# Altium PCB Action_Split.PcbDoc
Units mm, origin at the board's own origin, x right, y up, seen from the top; angles counter-clockwise.
Board outline 62.5 x 35 mm, 2 copper layers (Top Layer, Bottom Layer); 19 components, 10 nets, 42 pads, 0 vias.
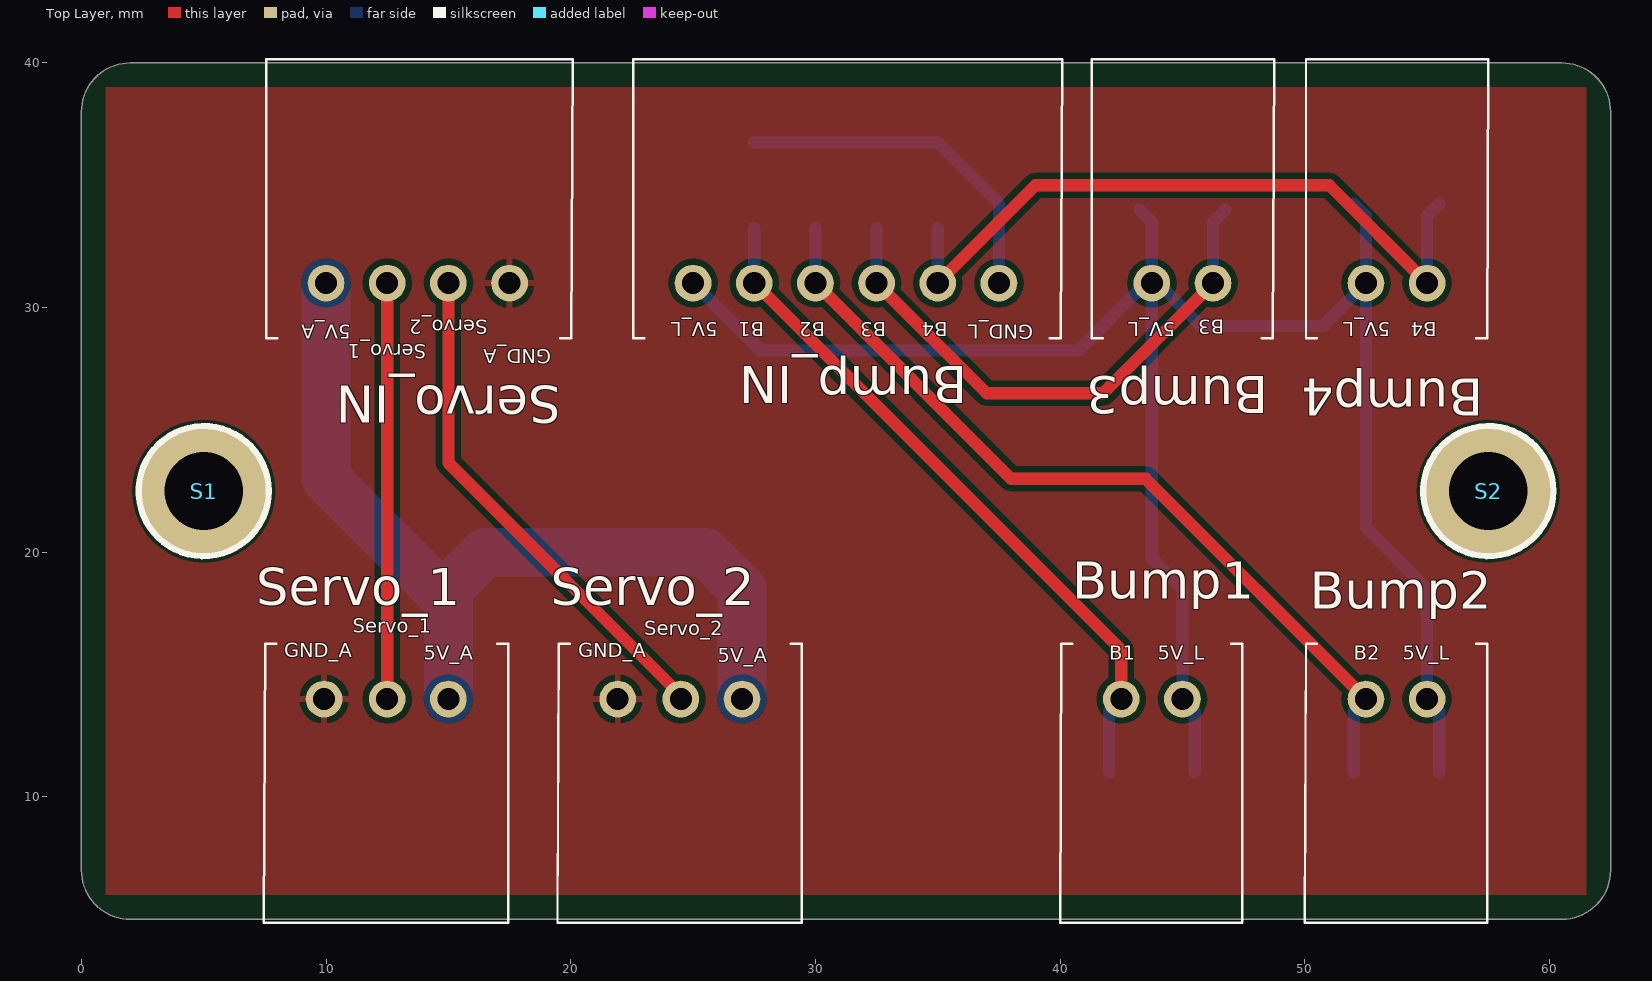
[diagram p0: Top Layer view]
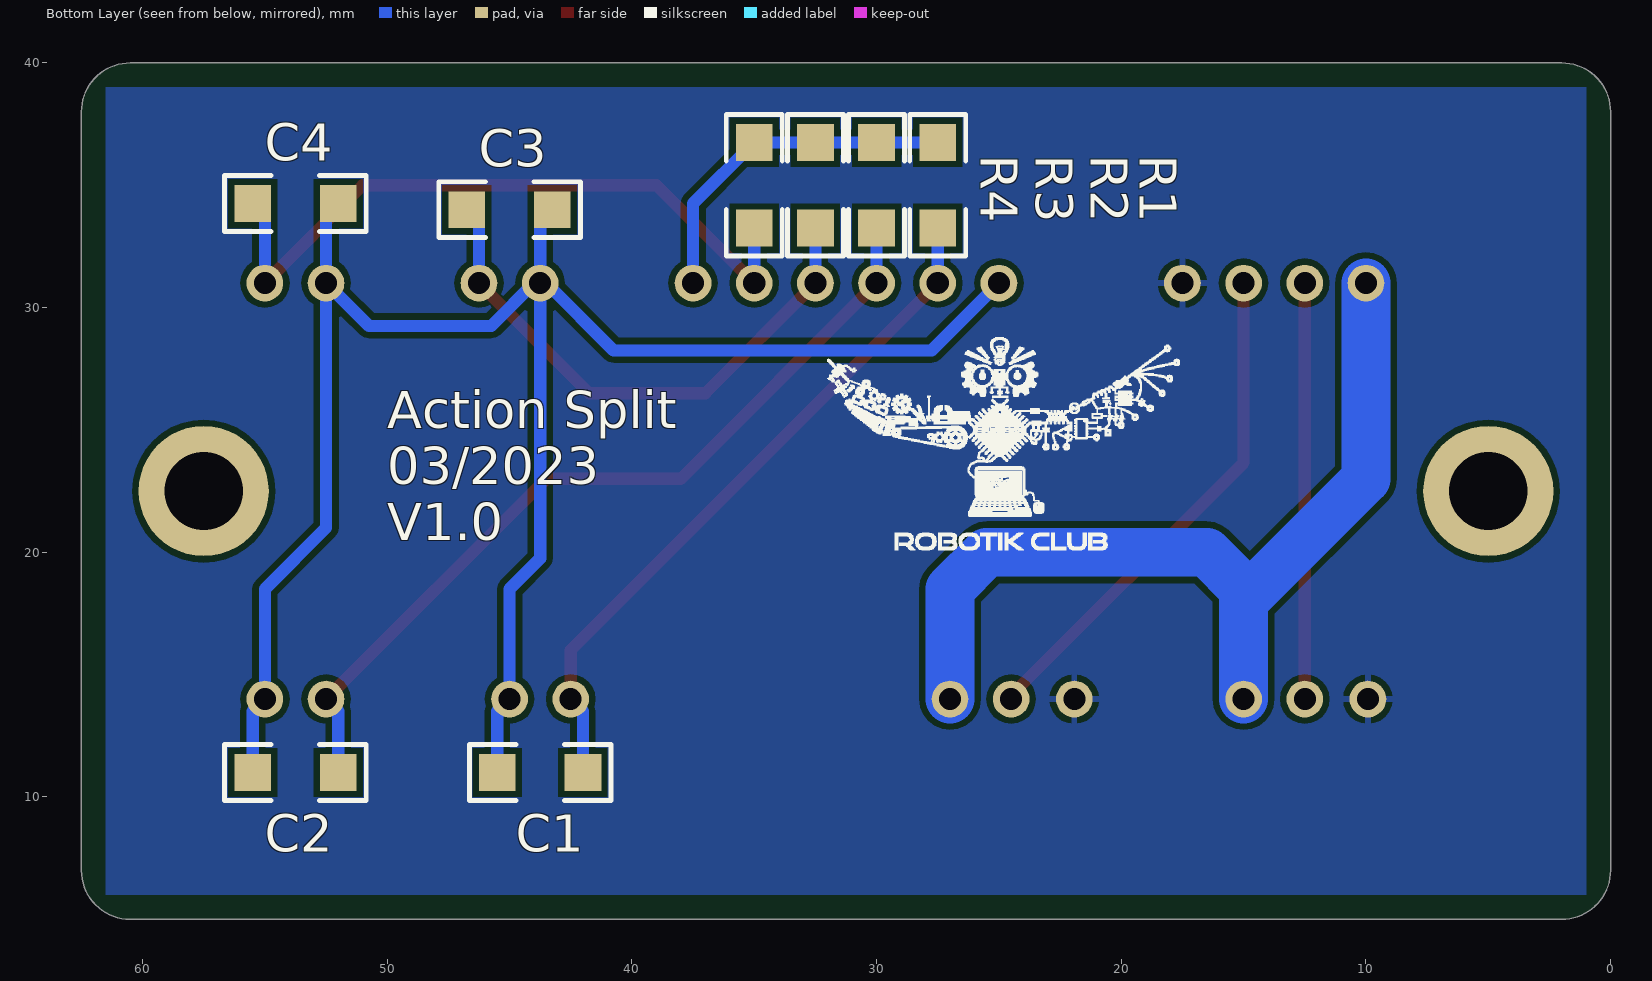
[diagram p1: Bottom Layer view, seen from below]
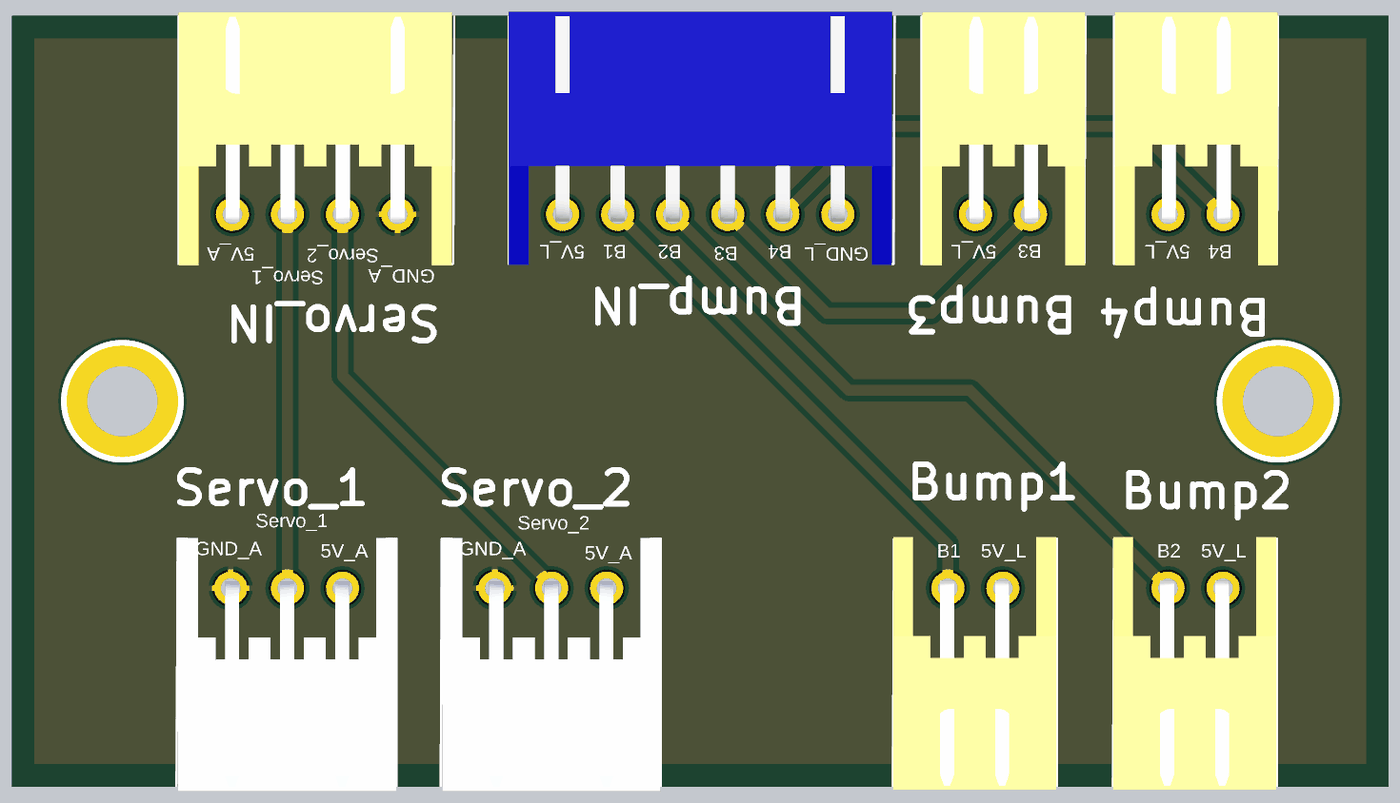
[diagram p2: 3D render of the assembled board from above, using the file's embedded part models]
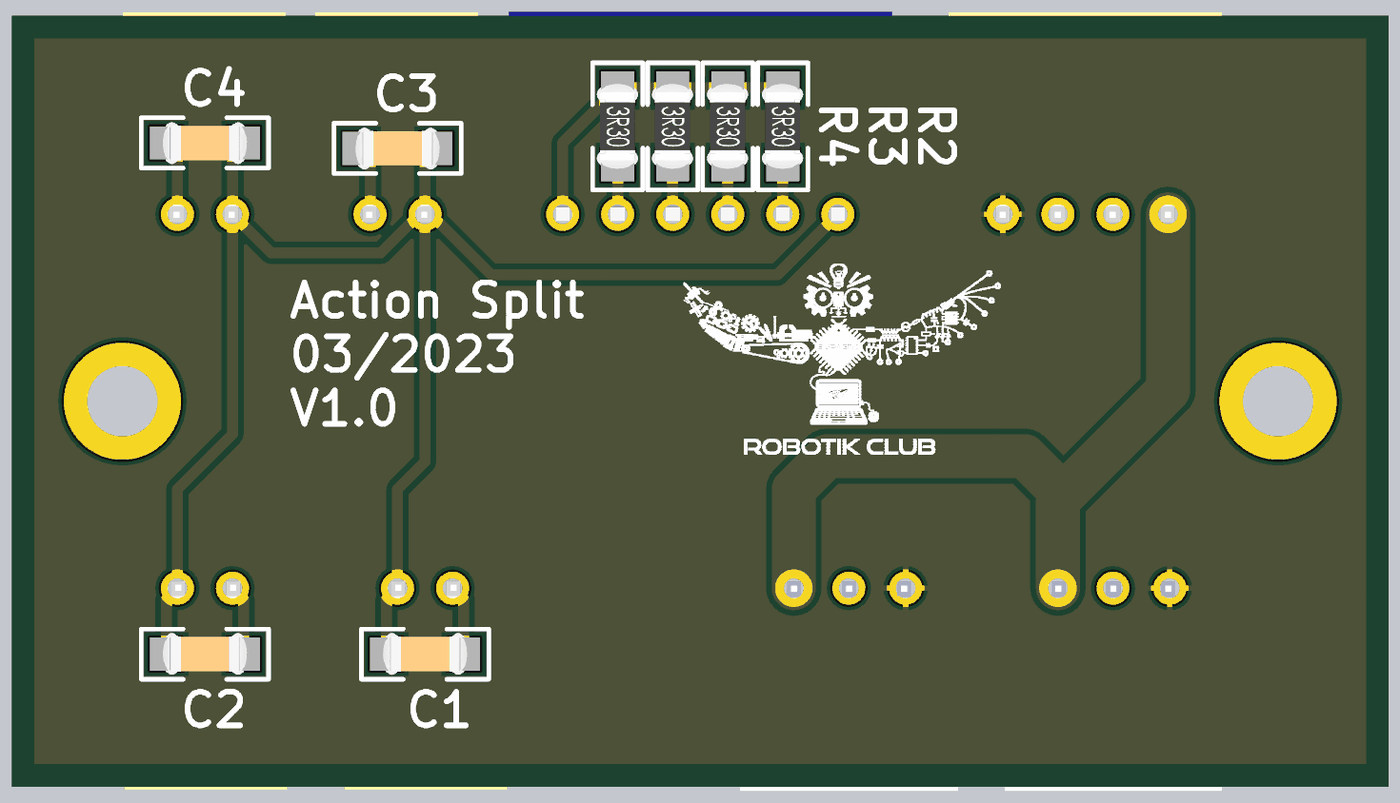
[diagram p3: 3D render of the assembled board from below, using the file's embedded part models]

## Layer stack, top to bottom
Top Solder: solder mask 0.0102, Solder Resist, Dk 3.5
Top Layer: signal copper 0.0356
Dielectric 1: dielectric 0.32, FR-4, Dk 4.8
Bottom Layer: signal copper 0.0356
Bottom Solder: solder mask 0.0102, Solder Resist, Dk 3.5

## Board outline
2,5 60.5,5 ccw(c60.5,7) 62.5,7 62.5,20 62.5,38 ccw(c60.5,38) 60.5,40 2,40 ccw(c2,38) 0,38 0,20 0,7 ccw(c2,7)

## Design rules (kind name [scope] priority, off if disabled: settings)
Clearance [All] p1: gap=0.25
PolygonConnect [All] p1: connectstyle=Relief reliefconductorwidth=0.254 reliefentries=4 polygonreliefangle="90 Angle" airgapwidth=0.254
RoutingVias [All] p1: holewidth=0.711 width=1.27 viastyle="Through Hole" minholewidth=0.711 minwidth=1.27 maxholewidth=0.711 maxwidth=1.27
SolderMaskExpansion [All] p1: expansion=0.102
Width [All] p1: maxlimit=2 minlimit=0.127 preferedwidth=0.5
30 further rules are at their usual default settings.

## Components (designator, comment, footprint, x,y, rotation, side; value= is the part's Value field where it differs from the comment)
Bump1 "Header 2H" S2B-XH-A 45,14 r180 top
Bump2 "Header 2H" S2B-XH-A 55,14 r180 top
Bump3 "Header 2H" S2B-XH-A 43.75,31 r0 top
Bump4 "Header 2H" S2B-XH-A 52.5,31 r0 top
Bump_IN "Header 6H" S6B-XH-A 25,31 r0 top
C1 "" "Capacitor 1206" 43.75,11 r0 bottom
C2 "" "Capacitor 1206" 53.75,11 r0 bottom
C3 "" "Capacitor 1206" 45,34 r180 bottom
C4 "" "Capacitor 1206" 53.75,34.25 r180 bottom
R1 "Res2" "Resistor 1206" 27.5,35 r270 bottom
R2 "Res2" "Resistor 1206" 30,35 r270 bottom
R3 "Res2" "Resistor 1206" 32.5,35 r270 bottom
R4 "Res2" "Resistor 1206" 35,35 r270 bottom
S1 "Screw M3" "Screw M3" 5,22.5 r0 top
S2 "Screw M3" "Screw M3" 57.5,22.5 r0 top
Servo_1 "S3B-XH-A" S3B-XH-A 15,14 r180 top
Servo_2 "S3B-XH-A" S3B-XH-A 27,14 r180 top
Servo_IN "Header 4H" S4B-XH-A 10,31 r0 top
? "" Logo_lowres 25,25 r180 bottom

## Footprints (in the part's own frame and the unit in brackets; to place one, negate y for a bottom-side part, rotate by r counter-clockwise, add the part's x,y. Pads: shape width x height; smd on the part's side, far side on the other; paste and mask are expansions set on the pad)
"Capacitor 1206" [mm]
  rect 1.5x1.5 smd: 1(-1.75,0) 2(1.75,0)
  silkscreen extent -2.89,-1.14 2.89,1.14, body extent -1.98,-0.99 1.98,0.96, height 1.3
Logo_lowres [mm]
  silkscreen extent -7.01,-4.93 7.39,3.76
"Resistor 1206" [mm]
  rect 1.5x1.5 smd: 1(-1.75,0) 2(1.75,0)
  silkscreen extent -2.89,-1.14 2.89,1.14, body extent -1.98,-0.95 1.98,0.93, height 0.55
S2B-XH-A [mm]
  round 1.5 hole 0.9: 1(0,0) 2(2.5,0)
  silkscreen extent -2.45,-2.26 5,9.14, body extent -2.41,-2.32 4.99,9.18, height 6.15
S3B-XH-A [mm]
  round 1.5 hole 0.9: 1(0,0) 2(2.5,0) 3(5.08,0)
  silkscreen extent -2.45,-2.26 7.54,9.14, body extent -2.44,-2.27 7.46,9.23, height 6.15
S4B-XH-A [mm]
  round 1.5 hole 0.9: 1(0,0) 2(2.5,0) 3(5,0) 4(7.5,0)
  silkscreen extent -2.45,-2.26 10.08,9.14, body extent -2.44,-2.32 9.96,9.18, height 6.15
S6B-XH-A [mm]
  round 1.5 hole 0.9: 1(0,0) 2(2.5,0) 3(5,0) 4(7.5,0) 5(10,0) 6(12.5,0)
  silkscreen extent -2.45,-2.26 15.08,9.14, body extent -2.45,-2.3 14.95,9.2, height 6.15
"Screw M3" [mm] "M3 iso Screw"
  round 5.32 hole 3.2 unplated: 0(0,0)
  silkscreen extent -2.66,-2.66 2.66,2.66

## Part data
Bump1 Bump2 Bump3 Bump4: "Header, 2-Pin, Right Angle"
Bump_IN: "Header, 6-Pin, Right Angle"
C1 C2 C3 C4: library part Cap, "Capacitor"
R1 R2 R3 R4: "Resistor"
Servo_1 Servo_2: library part "Header 3H", "Header, 3-Pin, Right Angle"
Servo_IN: "Header, 4-Pin, Right Angle"

## Nets (pads, with @x,y where several pads share a name; then routed paths per layer and width w, separated by ;. In a path a pad name is that pad's centre, name@x,y a point inside that pad or via, vN(x,y) a via of type N, cw(c..) or ccw(c..) an arc to the next point about the centre after c; other vN are vias at no path point)
5V_A: Servo_1.1 Servo_2.1 Servo_IN.1 | length 36.8
  Bottom Layer w2: Servo_IN.1 10,23 15,18 Servo_1.1 ; 15,18.5 16.5,20 25.5,20 27,18.5 Servo_2.1
5V_L: Bump1.1 Bump2.1 Bump3.1 Bump4.1 Bump_IN.1 C1.2 C2.2 C3.2 C4.2 | length 80.4
  Bottom Layer w0.5: Bump_IN.1@25,31.5 Bump_IN.1 27.75,28.25 40.75,28.25 43.5,31 Bump3.1 ; C3.2 43.75,33.5 Bump3.1 ; C1.2 45.5,13.5 Bump1.1 45,18.5 43.75,19.75 Bump3.1 ; C4.2 52.5,33.75 Bump4.1 ; C2.2 55.5,13.5 Bump2.1 55,18.5 52.5,21 Bump4.1 ; Bump3.1 44,31 45.75,29.25 50.75,29.25 Bump4.1
BUMP_1: Bump1.2 Bump_IN.2 C1.1 R1.2 | length 28.7
  Top Layer w0.5: Bump_IN.2 42.5,16 Bump1.2
  Bottom Layer w0.5: Bump_IN.2 R1.2 ; C1.1 42,13.5 Bump1.2
BUMP_2: Bump2.2 Bump_IN.3 C2.1 R2.2 | length 35
  Top Layer w0.5: Bump_IN.3 38,23 43.5,23 Bump2.2
  Bottom Layer w0.5: Bump_IN.3 R2.2 ; C2.1 52,13.5 Bump2.2
BUMP_3: Bump3.2 Bump_IN.4 C3.1 R3.2 | length 23
  Top Layer w0.5: Bump_IN.4 37,26.5 41.75,26.5 46.125,30.875 Bump3.2@46.375,30.875
  Bottom Layer w0.5: Bump_IN.4 R3.2 ; Bump3.2 46.25,33.5 C3.1
BUMP_4: Bump4.2 Bump_IN.5 C4.1 R4.2 | length 29
  Top Layer w0.5: Bump_IN.5 39,35 51,35 Bump4.2
  Bottom Layer w0.5: Bump_IN.5 R4.2 ; Bump4.2 55,33.75 C4.1
GND_A: Servo_1.3 Servo_2.3 Servo_IN.4
GND_L: Bump_IN.6 R1.1 R2.1 R3.1 R4.1 | length 14.3
  Bottom Layer w0.5: R1.1 R2.1 R3.1 R4.1 37.5,34.25 Bump_IN.6
SERVO_1: Servo_1.2 Servo_IN.2 | length 17
  Top Layer w0.5: Servo_1.2 Servo_IN.2
SERVO_2: Servo_2.2 Servo_IN.3 | length 20.8
  Top Layer w0.5: Servo_IN.3 15,23.654 Servo_2.2@24.5,14.154
pads on no net: S1.0 S2.0

## Polygon pours and split planes (outlines as drawn)
GND_A on Top Layer "GND_Plan" (solid, pour order 2): 1,39 1,20 1,6 61.5,6 61.5,39
GND_A on Bottom Layer "GND_Plan" (solid, pour order 4): 1,39 61.5,39 61.5,6 1,6

## Silkscreen, mask and mechanical layers (free items; w line width, h text height)
Top Overlay:
  text "Servo_2" at 16.6,29.7 h1 r180
  text "B3" at 46.7,29.7 h1 r180
  text "5V_L" at 26,29.6 h1 r180
  text "B1" at 27.9,29.6 h1 r180
  text "B2" at 30.4,29.6 h1 r180
  text "B3" at 32.9,29.6 h1 r180
  text "B4" at 35.4,29.6 h1 r180
  text "5V_L" at 44.7,29.6 h1 r180
  text "5V_L" at 53.5,29.6 h1 r180
  text "B4" at 55.4,29.6 h1 r180
  text "5V_A" at 11,29.5 h1 r180
  text "GND_L" at 38.9,29.5 h1 r180
  text "Servo_1" at 14.1,28.7 h1 r180
  text "GND_A" at 19.2,28.5 h1 r180
  text "Servo_1" at 11.1,16.5 h1
  text "Servo_2" at 23,16.4 h1
  text "GND_A" at 8.3,15.5 h1
  text "GND_A" at 20.3,15.5 h1
  text "5V_A" at 14,15.4 h1
  text "B1" at 42,15.4 h1
  text "5V_L" at 44,15.4 h1
  text "B2" at 52,15.4 h1
  text "5V_L" at 54,15.4 h1
  text "5V_A" at 26,15.3 h1
Bottom Overlay:
  text "Action Split / 03/2023 / V1.0" at 50,20.5 h1.52
Mechanical 1:
  the board outline again, w0.5